# Altium PCB PCB_V2-0_采集卡.PcbDoc
Units mm, origin at the board's own origin, x right, y up, seen from the top; angles counter-clockwise.
Board outline 17.65 x 48.77 mm, 4 copper layers (Top Layer, Signal Layer 1, Signal Layer 2, Bottom Layer), stack 0.778 mm thick; 84 components, 84 nets, 253 pads, 75 vias.
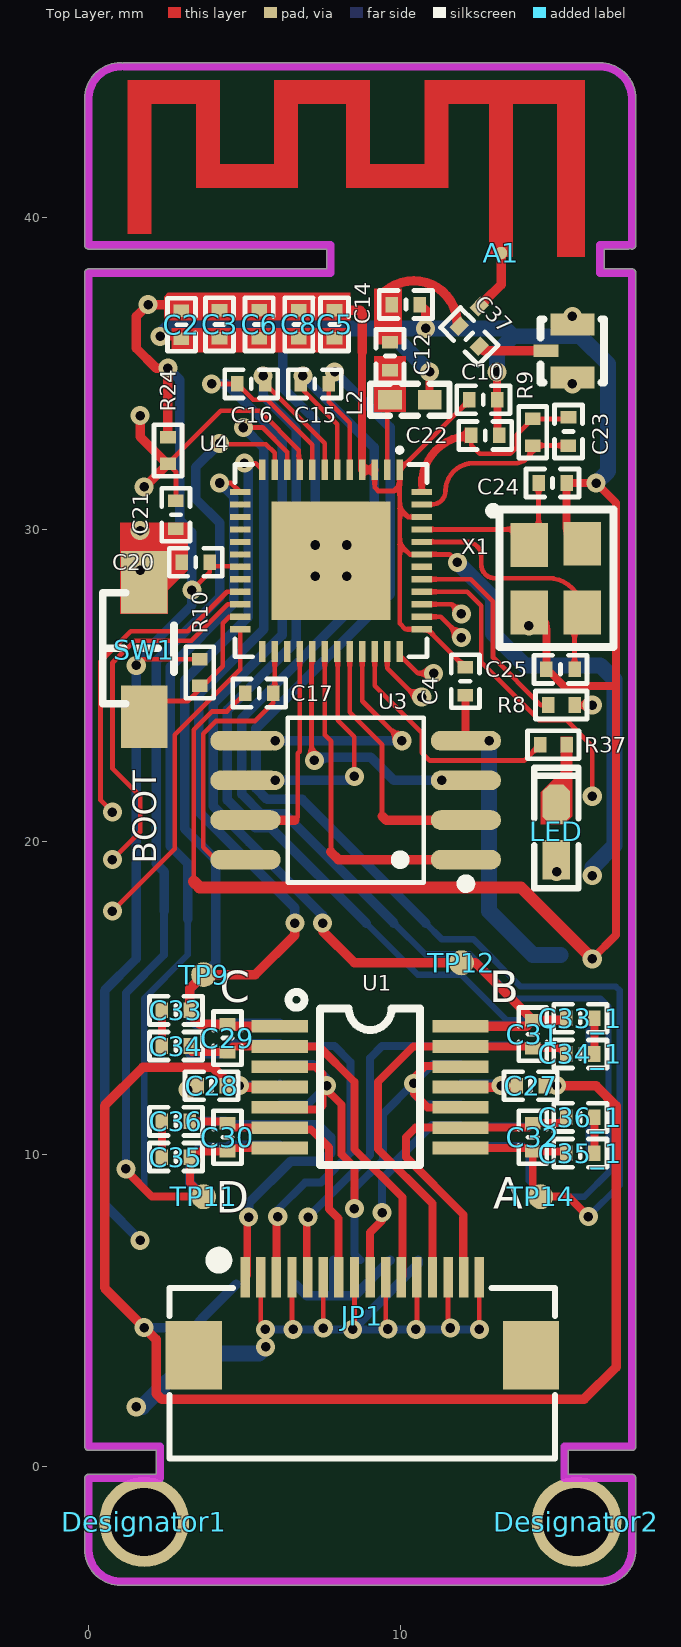
[diagram p0: Top Layer view]
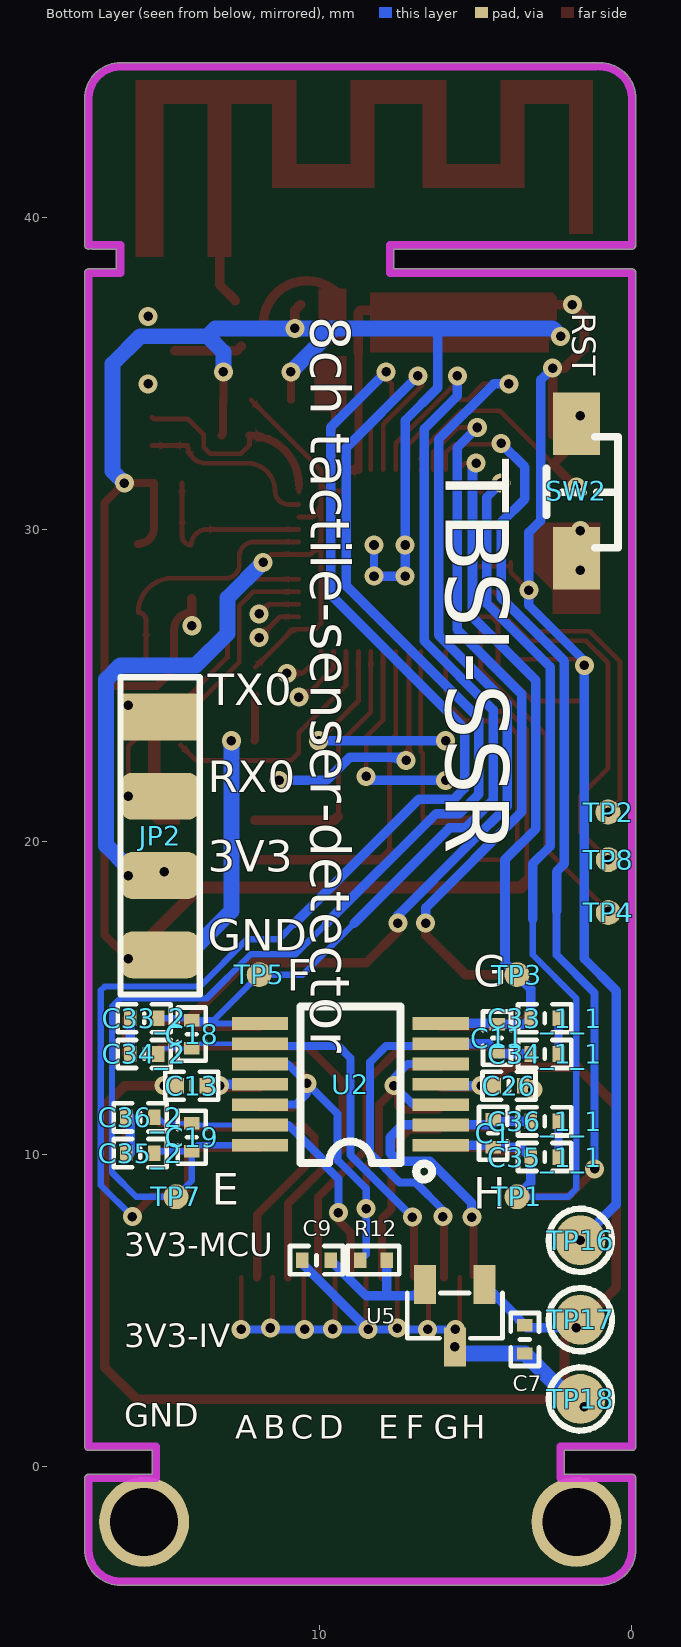
[diagram p1: Bottom Layer view, seen from below]
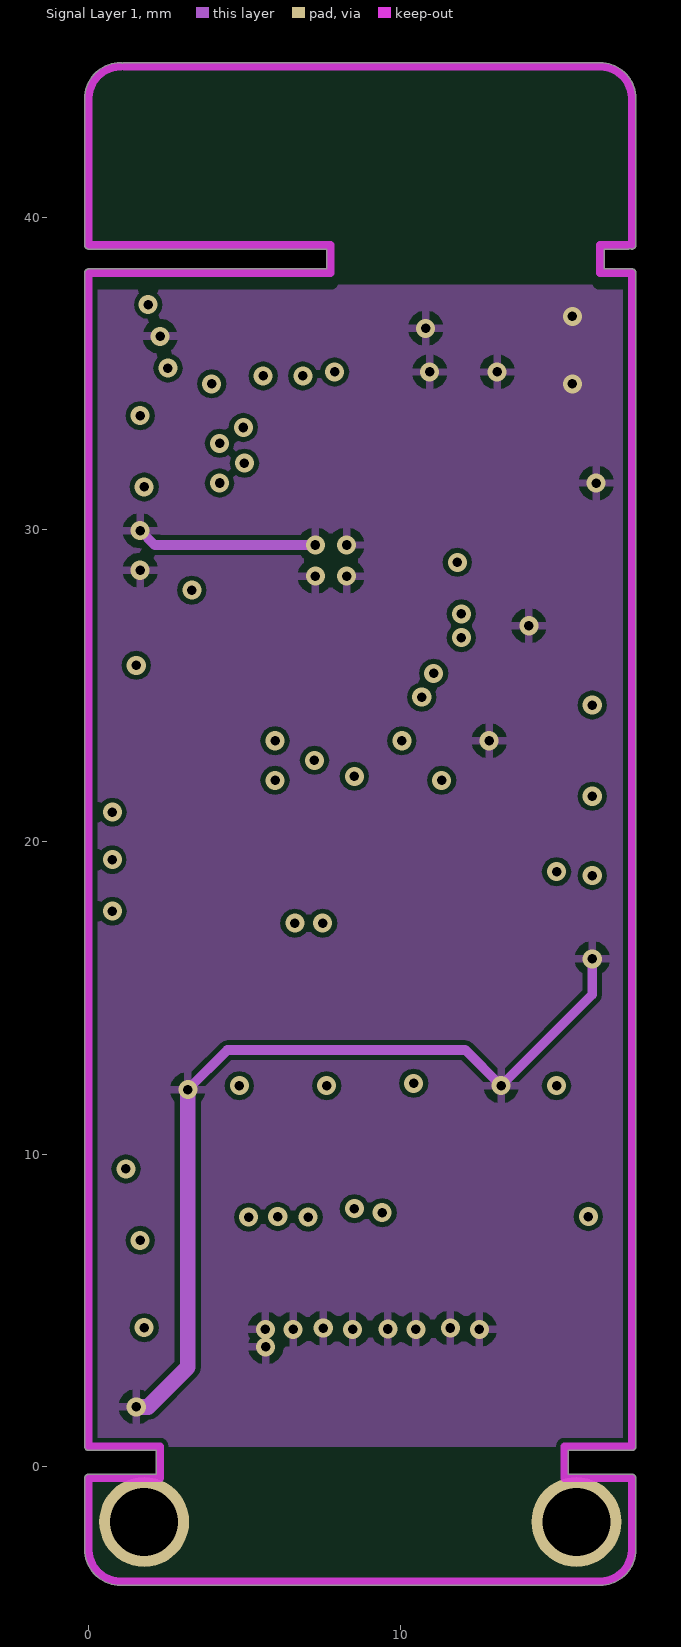
[diagram p2: Signal Layer 1]
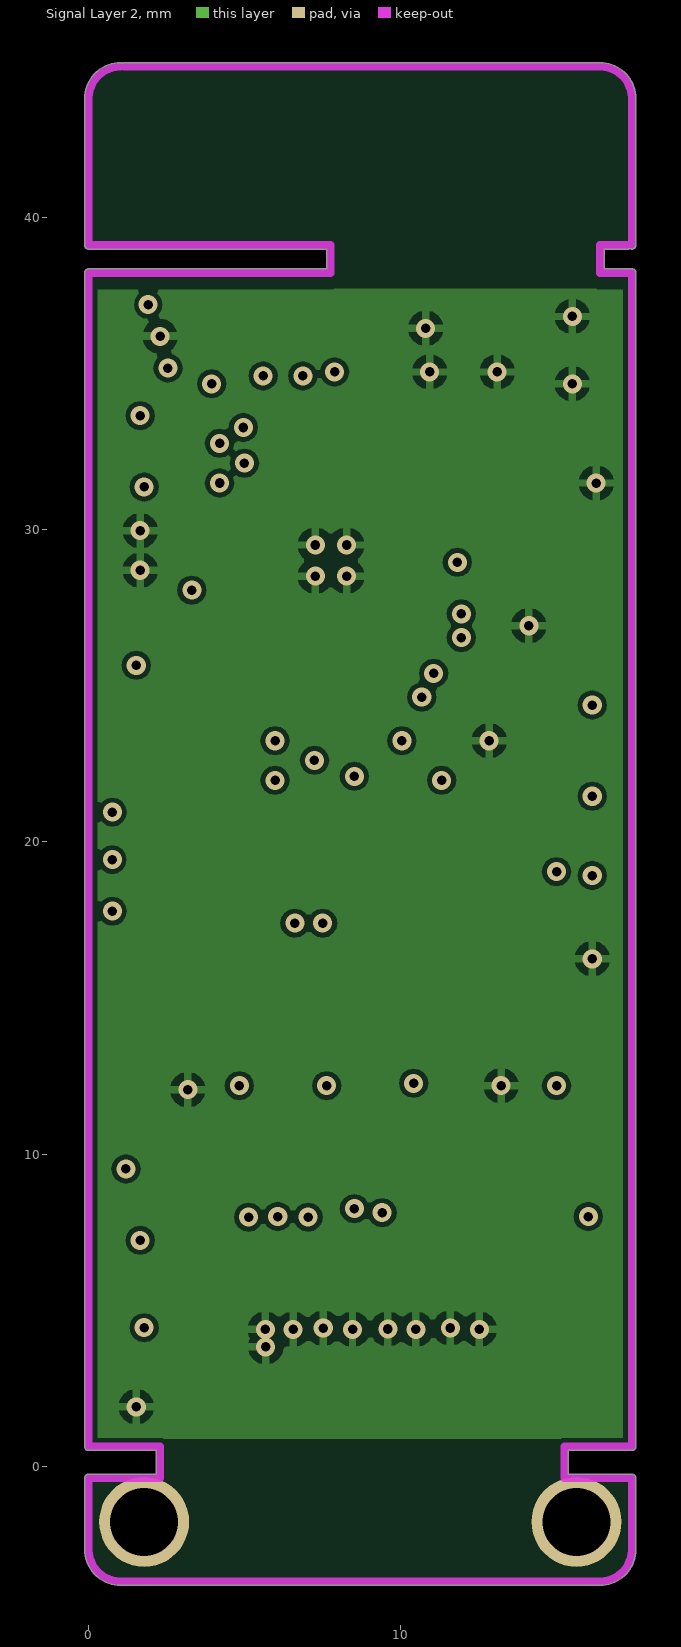
[diagram p3: Signal Layer 2]
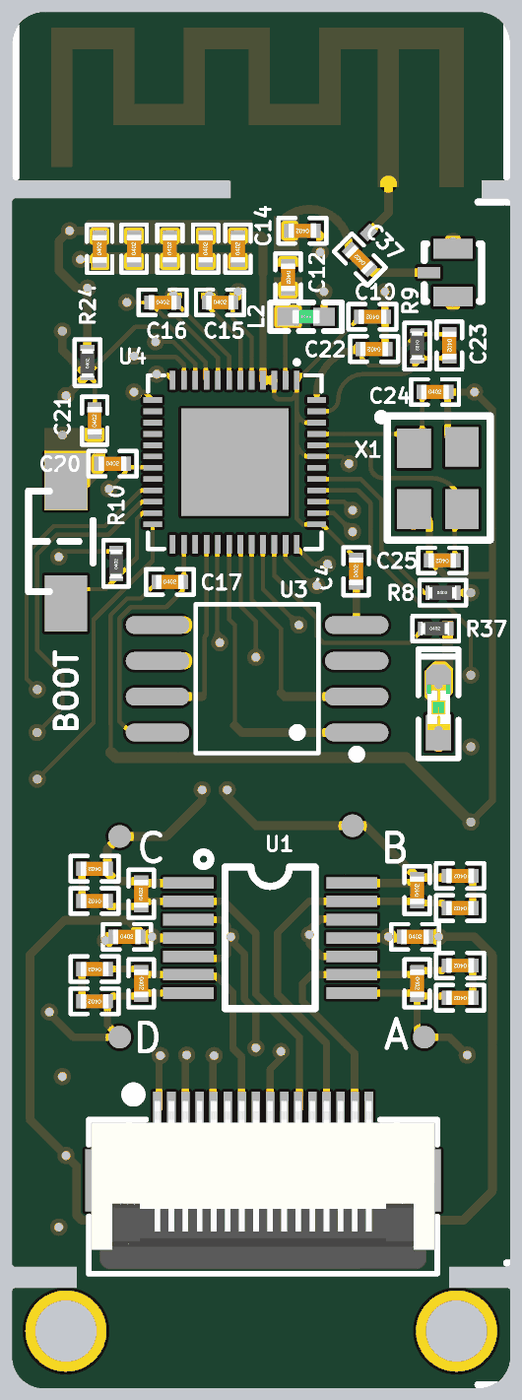
[diagram p4: 3D render of the assembled board from above, using the file's embedded part models]
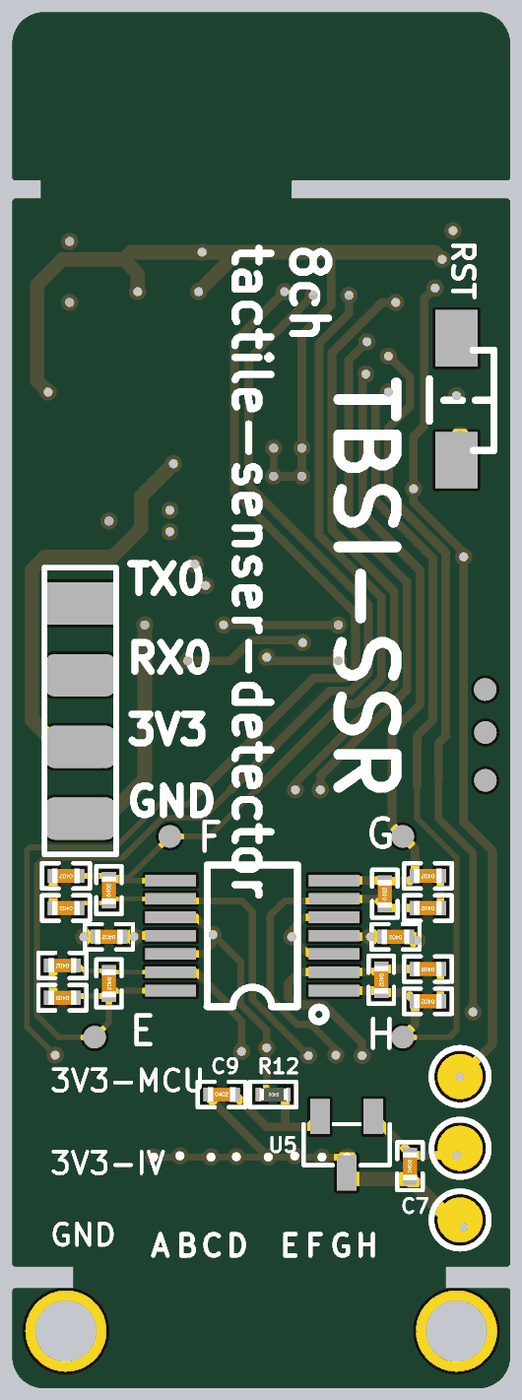
[diagram p5: 3D render of the assembled board from below, using the file's embedded part models]

## Layer stack, top to bottom
Top Solder: solder mask 0.0102, Solder Resist, Dk 3.5
Top Layer: signal copper 0.0356
Dielectric 1: core 0.254, FR-4, Dk 4.2
Signal Layer 1: signal copper 0.036
Dielectric 3: prepreg 0.127, Dk 4.2
Signal Layer 2: signal copper 0.036
Dielectric 2: core 0.254, Dk 4.2
Bottom Layer: signal copper 0.0356
Bottom Solder: solder mask 0.0102, Solder Resist, Dk 3.5

## Board outline
-0.127,-0.381 cw(c0,-0.381) 0,-0.254 2.159,-0.254 2.159,0.508 0,0.508 cw(c0,0.635) -0.127,0.635 -0.127,38.227 cw(c0,38.227) 0,38.354 7.62,38.354 7.62,38.989 0,38.989 cw(c0,39.116) -0.127,39.116 -0.127,43.815 cw(c1.016,43.815) 1.016,44.958 cw(c1.016,44.831) 1.079,44.941 cw(c1.143,44.831) 1.143,44.958 16.383,44.958 cw(c16.383,43.815) 17.526,43.815 17.526,39.116 cw(c17.399,39.116) 17.335,39.006 cw(c17.272,39.116) 17.272,38.989 16.51,38.989 16.51,38.354 17.399,38.354 cw(c17.399,38.227) 17.526,38.227 17.526,0.635 cw(c17.399,0.635) 17.399,0.508 15.367,0.508 15.367,-0.254 17.399,-0.254 cw(c17.399,-0.381) 17.526,-0.381 17.526,-2.667 cw(c16.383,-2.667) 16.383,-3.81 1.016,-3.81 cw(c1.016,-2.667) -0.127,-2.667

## Design rules (kind name [scope] priority, off if disabled: settings)
Clearance [All] p1: gap=0.152 ignorepadtopadclearanceinfootprint=FALSE except(0: Arc-Hole Track-Hole SMDPad-Hole THPad-Hole Via-Hole Fill-Hole Poly-Hole Region-Hole Text-Hole)
HoleToHoleClearance [All] p1: gap=0.102 allowstackedmicrovias=TRUE
MinimumSolderMaskSliver [All] p1: minsoldermaskwidth=0.102
PolygonConnect [All] p1: connectstyle=Relief reliefconductorwidth=0.254 reliefentries=4 polygonreliefangle="90 Angle" airgapwidth=0.254
RoutingVias [All] p1: holewidth=0.305 width=0.61 viastyle="Through Hole" minholewidth=0.305 minwidth=0.61 maxholewidth=0.381 maxwidth=0.635
SilkToSilkClearance [All] p1: silktosilkclearance=0
SilkToSolderMaskClearance [IsPad] p1: minsilkscreentomaskgap=0 clearancetoexposedcopper=TRUE
SolderMaskExpansion [All] p1: expansion=0.102
Width [All] p1: maxlimit=1.27 minlimit=0.152 preferedwidth=0.152
26 further rules are at their usual default settings.

## Classes and differential pairs
component class sheet: A1 C1 C2 C3 C4 C5 C6 C7 C8 C9 C10 C11 C12 C13 C14 C15 C16 C17 C18 C19 C20 C21 C22 C23 C24 C25 C26 C27 C28 C29 C30 C31 C32 JP2 L2 LED R8 R9 R10 R12 R24 R37 SW1 SW2 TP1 TP3 TP5 TP7 TP9 TP11 TP12 TP14 U1 U2 U3 U4 U5 X1

## Components (designator, comment, footprint, x,y, rotation, side; value= is the part's Value field where it differs from the comment)
A1 "PCB_ANT" PCB_ANT 8.636,41.021 r0 top
C1 "104" "C 0402_L" 4.445,10.668 r270 bottom
C2 "Cap" "C 0402_L" 2.971,36.566 r90 top value=1uF
C3 "Cap" "C 0402_L" 4.191,36.576 r90 top value=1uF
C4 "Cap" "C 0402_L" 12.065,25.146 r90 top value=0.1uF
C5 "Cap" "C 0402_L" 7.874,36.576 r90 top value=1uF
C6 "Cap" "C 0402_L" 5.461,36.576 r90 top value=10uF
C7 "Cap" "C 0402_L" 3.429,4.064 r90 bottom value=100nF
C8 "Cap" "C 0402_L" 6.731,36.576 r90 top value=0.1uF
C9 "Cap" "C 0402_L" 10.102,6.604 r180 bottom value=1uF
C10 "Cap" "C 0402_L" 12.642,34.163 r180 top value=0.1uF
C11 "104" "C 0402_L" 4.318,13.716 r90 bottom
C12 "Cap" "C 0402_L" 9.652,35.56 r270 top value=4.7pF
C13 "104" "C 0402_L" 14.097,12.192 r0 bottom
C14 "Cap" "C 0402_L" 10.16,37.211 r180 top value=2.7pF
C15 "Cap" "C 0402_L" 7.239,34.671 r0 top value=270pF
C16 "Cap" "C 0402_L" 5.207,34.671 r0 top value=270pF
C17 "Cap" "C 0402_L" 5.461,24.765 r0 top value=1uF
C18 "104" "C 0402_L" 14.097,13.843 r90 bottom
C19 "104" "C 0402_L" 14.097,10.541 r270 bottom
C20 "Cap" "C 0402_L" 3.429,28.956 r0 top value=0.1uF
C21 "Cap" "C 0402_L" 2.794,30.48 r90 top value=1uF
C22 "Cap" "C 0402_L" 12.7,33.02 r180 top value=10nF
C23 "Cap" "C 0402_L" 15.367,33.147 r270 top value=3.3nF
C24 "Cap" "C 0402_L" 14.859,31.496 r0 top value=22pF
C25 "Cap" "C 0402_L" 15.113,25.527 r180 top value=22pF
C26 "104" "C 0402_L" 3.937,12.192 r0 bottom
C27 "104" "C 0402_L" 14.155,12.192 r0 top
C28 "104" "C 0402_L" 3.937,12.192 r0 top
C29 "47pF" "C 0402_L" 4.445,13.716 r90 top
C30 "47pF" "C 0402_L" 4.445,10.541 r270 top
C31 "47pF" "C 0402_L" 14.224,13.843 r90 top
C32 "47pF" "C 0402_L" 14.224,10.541 r270 top
C33 "47pF" "C 0402_L" 2.794,14.605 r180 top (schematic designator C29)
C33_1 "47pF" "C 0402_L" 15.748,14.351 r180 top (schematic designator C29)
C33_1_1 "47pF" "C 0402_L" 2.794,14.351 r0 bottom (schematic designator C29)
C33_2 "47pF" "C 0402_L" 15.621,14.351 r0 bottom (schematic designator C29)
C34 "47pF" "C 0402_L" 2.794,13.462 r180 top (schematic designator C29)
C34_1 "47pF" "C 0402_L" 15.748,13.208 r180 top (schematic designator C29)
C34_1_1 "47pF" "C 0402_L" 2.794,13.208 r0 bottom (schematic designator C29)
C34_2 "47pF" "C 0402_L" 15.621,13.208 r0 bottom (schematic designator C29)
C35 "47pF" "C 0402_L" 2.794,9.906 r180 top (schematic designator C29)
C35_1 "47pF" "C 0402_L" 15.748,10.033 r180 top (schematic designator C29)
C35_1_1 "47pF" "C 0402_L" 2.794,9.906 r0 bottom (schematic designator C29)
C35_2 "47pF" "C 0402_L" 15.748,10.033 r0 bottom (schematic designator C29)
C36 "47pF" "C 0402_L" 2.794,11.049 r180 top (schematic designator C29)
C36_1 "47pF" "C 0402_L" 15.748,11.176 r180 top (schematic designator C29)
C36_1_1 "47pF" "C 0402_L" 2.794,11.049 r0 bottom (schematic designator C29)
C36_2 "47pF" "C 0402_L" 15.748,11.176 r0 bottom (schematic designator C29)
C37 "Cap" "C 0402_L" 12.192,36.195 r135 top value=0.1uF (schematic designator C10)
Designator1 "Comment" "M3 125X200" 1.778,-1.778 r0 top
Designator2 "Comment" "M3 125X200" 15.621,-1.778 r0 top
JP1 "HDR-1X16" "FPC0.5 2H-WS-16P" 8.763,3.556 r0 top
JP2 "HDR-1X4" 2.54_pad_4 15.113,20.193 r90 bottom
L2 "Inductor" "L 0402" 10.287,34.163 r180 top value=1.6nH
LED "红色" "LED 0603R" 14.986,20.32 r90 top (schematic designator LED1)
R8 "Res1" "R 0402_L" 15.113,24.384 r0 top value=499
R9 "Res1" "R 0402_L" 14.224,33.147 r270 top value=20K
R10 "Res1" "R 0402_L" 3.556,25.4 r90 top value=10K
R12 "Res1" "R 0402_L" 8.255,6.604 r0 bottom value=0
R24 "Res1" "R 0402_L" 2.54,32.512 r90 top value=10K
R37 "1K" "R 0402_L" 14.859,23.114 r0 top
SW1 "3x6x5" KEY-little 1.905,26.162 r0 top
SW2 "3x6x5" KEY-little 1.905,31.242 r0 bottom
TP1 "TEST" "TEST 0.8" 3.683,8.636 r180 bottom
TP2 "TEST" "TEST 0.8" 0.762,20.955 r270 bottom
TP3 "TEST" "TEST 0.8" 3.683,15.748 r180 bottom
TP4 "TEST" "TEST 0.8" 0.756,17.735 r270 bottom
TP5 "TEST" "TEST 0.8" 11.938,15.748 r180 bottom
TP7 "TEST" "TEST 0.8" 14.605,8.636 r180 bottom
TP8 "TEST" "TEST 0.8" 0.756,19.431 r270 bottom
TP9 "TEST" "TEST 0.8" 3.683,15.748 r270 top
TP11 "TEST" "TEST 0.8" 3.683,8.636 r90 top
TP12 "TEST" "TEST 0.8" 11.938,16.129 r90 top
TP14 "TEST" "TEST 0.8" 14.478,8.636 r90 top
TP16 "TEST" "TEST 1.6" 1.651,7.239 r180 bottom (schematic designator TP10)
TP17 "TEST" "TEST 1.6" 1.651,4.699 r180 bottom (schematic designator TP10)
TP18 "TEST" "TEST 1.6" 1.651,2.159 r180 bottom (schematic designator TP10)
U1 "ADA4505-4ARUZ" ADA4505-4ARUZ 8.89,12.065 r0 top
U2 "ADA4505-4ARUZ" ADA4505-4ARUZ 8.89,12.319 r0 bottom
U3 "SPI-FLASH" SPI-Flash 8.763,21.336 r90 top
U4 "ESP32-D0WDQ6" ESP32D0WDQ6 7.76,29.01 r180 top
U5 "REF2925" REF2925AIDBZR 5.715,5.08 r90 bottom
X1 "40M" 晶振3225 15.113,28.321 r270 top

## Footprints (in the part's own frame and the unit in brackets; to place one, negate y for a bottom-side part, rotate by r counter-clockwise, add the part's x,y. Pads: shape width x height; smd on the part's side, far side on the other; paste and mask are expansions set on the pad)
2.54_pad_4 [mm]
  rect 1.5x2.54 smd: 1(3.81,0)
  rrect50% 1.5x2.54 smd: 2(1.27,0) 3(-1.27,0) 4(-3.81,0)
  silkscreen extent -5.08,-1.27 5.08,1.27
ADA4505-4ARUZ [mil]
  rect 71x16 smd: 1(-109,80.04) 2(-109,54.45) 3(-109,28.86) 4(-109,3.27) 5(-109,-22.32) 6(-109,-47.91) 7(-109,-73.5) 8(119,-73.5) 9(119,-47.91) 10(119,-22.32) 11(119,3.27) 12(119,28.86) 13(119,54.45) 14(119,80.04)
  silkscreen extent -98,-95 68,123
"C 0402_L" [mm] "无极性贴片电容"
  rect 0.4x0.5 smd: 1(-0.45,0) 2(0.45,0)
  silkscreen extent -0.85,-0.45 0.85,0.45, body extent -0.5,-0.26 0.5,0.26, height 0.53
ESP32D0WDQ6 [mm]
  rect 0.2x0.665 smd: 1(-2.2,-2.908) 2(-1.8,-2.908) 3(-1.4,-2.908) 4(-1,-2.908) 5(-0.6,-2.908) 6(-0.2,-2.908) 7(0.2,-2.908) 8(0.6,-2.908) 9(1,-2.908) 10(1.4,-2.908) 11(1.8,-2.908) 12(2.2,-2.908) 25(2.2,2.908) 26(1.8,2.908) 27(1.4,2.908) 28(1,2.908) 29(0.6,2.908) 30(0.2,2.908) 31(-0.2,2.908) 32(-0.6,2.908) 33(-1,2.908) 34(-1.4,2.908) 35(-1.8,2.908) 36(-2.2,2.908)
  rect 0.665x0.2 smd: 13(2.908,-2.2) 14(2.908,-1.8) 15(2.908,-1.4) 16(2.908,-1) 17(2.908,-0.6) 18(2.908,-0.2) 19(2.908,0.2) 20(2.908,0.6) 21(2.908,1) 22(2.908,1.4) 23(2.908,1.8) 24(2.908,2.2) 37(-2.908,2.2) 38(-2.908,1.8) 39(-2.908,1.4) 40(-2.908,1) 41(-2.908,0.6) 42(-2.908,0.2) 43(-2.908,-0.2) 44(-2.908,-0.6) 45(-2.908,-1) 46(-2.908,-1.4) 47(-2.908,-1.8) 48(-2.908,-2.2)
  rect 3.8x3.8 smd: 49(0,0)
  silkscreen extent -3.08,-3.61 3.08,3.08
"FPC0.5 2H-WS-16P" [mm] "长：12.2mm，宽：5.2mm，高：2mm"
  rect 1.8x2.2 smd: 0(-5.4,0) 0(5.4,0)
  rect 0.3x1.3 smd: 1(-3.75,2.497) 2(-3.25,2.497) 3(-2.75,2.497) 4(-2.25,2.497) 5(-1.75,2.497) 6(-1.25,2.497) 7(-0.75,2.497) 8(-0.25,2.497) 9(0.25,2.497) 10(0.75,2.497) 11(1.25,2.497) 12(1.75,2.497) 13(2.25,2.497) 14(2.75,2.497) 15(3.25,2.497) 16(3.75,2.497)
  silkscreen extent -6.18,-3.3 6.18,3.23, body extent -6.1,-3.15 6.1,2.85, height 2
KEY-little [mm]
  rect 1.5x2 smd: 1(-0.127,-2.159) 2(-0.127,2.159)
  silkscreen extent -1.45,-1.74 0.83,1.82
"L 0402" [mil] "小功率贴片电感"
  rect 30x25 smd: 1(-25,0) 2(25,0)
  silkscreen extent -50,-20 50,20, body extent -20,-10 20,10, height 20
"LED 0603R" [mil] "红色0603LED"
  rect 50x35 smd: 1(-35,0.26)
  oct 50x35 smd: 2(35,0.26)
  silkscreen extent -71,-28 81,28, body extent -31,-16 31,16, height 18
"M3 125X200" [mm] "M3螺丝孔，孔125Mil，焊盘200Mil"
  round 2.88 hole 2.175: 1(0,0)
PCB_ANT [mm]
  round 0.4 smd paste-0.2: 1(4.572,-2.159)
  Top Layer region: 4.195,-2.273 4.949,-2.273 4.949,2.627 6.368,2.627 6.368,-2.273 7.249,-2.273 7.249,3.381 2.122,3.381 2.122,0.681 0.365,0.681 0.365,3.381 -2.689,3.381 -2.689,0.681 -4.435,0.681 -4.435,3.381 -7.389,3.381 -7.389,-1.547 -6.635,-1.547 -6.635,2.627 -5.189,2.627 -5.189,-0.073 -1.935,-0.073 -1.935,2.627 -0.389,2.627 -0.389,-0.073 2.876,-0.073 2.876,2.627 4.195,2.627 4.195,-2.273
"R 0402_L" [mm] "1/16W贴片电阻"
  rect 0.4x0.5 smd: 1(-0.4,0) 2(0.45,0)
  silkscreen extent -0.8,-0.45 0.85,0.45, body extent -0.5,-0.25 0.5,0.25, height 0.3
REF2925AIDBZR [mm]
  rect 1.25x0.7 smd: 1(0.746,-0.994) 2(0.746,0.906) 3(-1.254,-0.044)
  silkscreen extent -0.98,-1.57 0.47,1.48
SPI-Flash [mm]
  oval 0.63x2.25 smd: 1(-1.905,-3.32) 2(-0.635,-3.32) 3(0.635,-3.32) 4(1.905,-3.32) 5(1.905,3.74) 6(0.635,3.74) 7(-0.635,3.74) 8(-1.905,3.74)
  silkscreen extent -2.82,-3.47 2.64,2.39
"TEST 0.8" [mm] "测试点0.8mm"
  round 0.8 smd: 1(0,0)
"TEST 1.6" [mm] "测试点1.6mm"
  round 1.6 smd paste-1.6: 1(0,0)
  silkscreen extent -1.02,-1.02 1.01,1.02
晶振3225 [mm]
  rect 1.4x1.2 smd: 1(-1.186,-0.998) 2(0.973,-0.998) 3(0.973,0.702) 4(-1.227,0.702)
  silkscreen extent -2.41,-2.29 2.07,1.7

## Part data
A1: "2.4G-esp32"
C1 C11 C13 C18 C19 C26 C27 C28 C29 C30 C31 C32 C33 C33_1 C33_1_1 C33_2 C34 C34_1 C34_1_1 C34_2 C35 C35_1 C35_1_1 C35_2 C36 C36_1 C36_1_1 C36_2: library part C, "无极性贴片电容", BOM名称=无极性贴片电容, 学习资源=www.ooocke.com, 版权归属=源创客
C2 C3 C4 C5 C6 C7 C8 C9 C10 C12 C14 C15 C16 C17 C20 C21 C22 C23 C24 C25 C37: "Capacitor", LatestRevisionDate=17-Jul-2002, LatestRevisionNote="Re-released for DXP Platform.", PackageDescription="Radial Cap, Thru-Hole; 2 Leads; 0.3 in Pin Spacing", PackageReference=RAD-0.3, Published=8-Jun-2000, Publisher="Altium Limited"
JP1: library part "Header 16", "16P接插件", BOM名称=16P接插件, 学习资源=www.ooocke.com, 版权归属=源创客
JP2: library part "Header 4", "4P接插件", BOM名称=4P接插件, 学习资源=www.ooocke.com, 版权归属=源创客
LED: library part LED-SMD, "贴片LED", BOM名称=贴片LED, 学习资源=www.ooocke.com, 版权归属=源创客
R8 R9 R10 R12 R24: "Resistor", LatestRevisionDate=17-Jul-2002, LatestRevisionNote="Re-released for DXP Platform.", PackageDescription="Axial Device, Thru-Hole; 2 Leads; 0.3 in Pin Spacing", PackageReference=AXIAL-0.3, Published=8-Jun-2000, Publisher="Altium Limited"
R37: library part R, "贴片电阻", BOM名称=贴片电阻, 学习资源=www.ooocke.com, 版权归属=源创客
SW1 SW2: library part "TSW 3x6", "3x6轻触开关", BOM名称=3x6轻触开关, 学习资源=www.ooocke.com, 版权归属=源创客
TP1 TP2 TP3 TP4 TP5 TP7 TP8 TP9 TP11 TP12 TP14 TP16 TP17 TP18: "测试点", BOM名称=测试点, 学习资源=www.ooocke.com, 版权归属=源创客
U5: "2.5V reference"
X1: library part XTAL-4P, "4脚无源晶振", BOM名称=4脚无源晶振, 学习资源=www.ooocke.com, 版权归属=源创客
L2: Code_IEC=1005, Code_JEITA=0402, LatestRevisionDate=29-May-2009, LatestRevisionNote="IPC-7351 Footprint Added.", PackageDescription="Chip Inductor", PackageReference=0402-A, Published=8-Jun-2000, Publisher="Altium Limited"

## Free pads (board coordinates)
  rect 0.4x0.5 smd rot 135: 1(12.509,37.148)
  rect 0.8x0.4 smd: 1(14.644,35.726)
  rect 1.4x0.7 smd: 2(15.494,34.876) 3(15.494,36.576)

## Via types
v1: diameter 0.61, hole 0.305, Top Layer to Bottom Layer, tented both sides, 74 vias
v2: diameter 0.61, hole 0.305, Top Layer to Bottom Layer, 1 vias

## Nets (pads, with @x,y where several pads share a name; then routed paths per layer and width w, separated by ;. In a path a pad name is that pad's centre, name@x,y a point inside that pad or via, vN(x,y) a via of type N, cw(c..) or ccw(c..) an arc to the next point about the centre after c; other vN are vias at no path point)
+3.3: C2.2 C3.2 C4.2 C5.2 C6.2 C8.2 C10.2 C20.2 JP2.3 LED.1 R10.2 R24.2 TP16.1 U4.1 U4.3 U4.4 U4.19 U4.37 U4.43 U4.46 | length 75.5
  Top Layer w0.152: v1(1.524,25.654) 1.72,25.85 R10.2 ; C2.2@2.776,37.211 C2.2 ; v1(3.302,28.067) 3.879,28.644 C20.2 ; C20.2@3.948,28.829 4.834,28.829 cw(c4.834,28.81) U4.19 ; U4.3 9.16,31.353 9.271,31.242 9.779,31.242 9.96,31.423 ; U4.46 10.23,30.41 9.96,30.68 ; v1(11.811,28.956) 11.557,29.21 U4.43 10.287,29.21 9.96,29.537 ; C4.2 10.851,26.81 U4.37 10.147,26.81 9.96,26.997 9.96,29.537 ; C10.2 12.192,34.149 U4.1 9.96,31.423 ; 9.96,29.537 9.96,30.68 ; 9.96,30.68 9.96,31.423
  Top Layer w0.254: 8.76,35.69 U4.4 U4.3
  Top Layer w0.305: R24.2@2.54,33.038 v1(2.54,35.179) 2.159,35.179 1.524,35.814 1.524,36.83 v1(1.905,37.211) C2.2@2.776,37.211 ; C5.2 8.694,37.026 8.763,36.957 8.763,35.692 8.76,35.69
  Bottom Layer w0.305: v1(1.651,7.239) 0.508,8.382 0.508,15.24 1.524,16.256 v1(1.524,25.654) 1.524,25.804 3.302,27.582 v1(3.302,28.067) 3.302,29.914 2.921,30.295 2.921,34.798 v1(2.54,35.179)
  Bottom Layer w0.508: v1(11.811,28.956) 12.954,27.813 12.954,26.67 13.97,25.654 16.383,25.654 16.84,25.197 16.84,19.888 16.129,19.177 v1(16.129,18.923)
  other v1: 14.986,19.05
+5: C7.2 C13.2 C26.2 C27.2 C28.2 TP17.1 U1.4 U2.4 U5.1 | length 47.4
  Top Layer w0.305: C28.2 4.431,12.148 U1.4 ; v1(4.826,12.192) 4.572,12.192 3.984,12.78 1.731,12.78 0.508,11.557 0.508,5.715 v1(1.778,4.445) 2.158,4.065 2.158,2.33 2.337,2.151 15.867,2.151 16.891,3.175 16.891,11.543 16.256,12.178 16.256,12.192 v1(14.986,12.192)
  Bottom Layer w0.305: v1(1.778,4.445) 3.36,4.445 C7.2 3.617,4.702 3.617,4.722 U5.1 ; v1(4.826,12.192) 6.077,12.192 U2.4
A1-2: C12.1 C14.2 C37.2 | length 3.4
  Top Layer w0.305: 9.356,37.489 cw(c10.414,36.576) C37.2@11.811,36.576
A1-3: C37.1 pad.1@14.644,35.726 | length 2.2
  Top Layer w0.305: C37.1 12.661,35.726 pad.1@14.644,35.726
ADA4505_INA-: C1.1 C36_1_1.2 JP1.1 U2.2 | length 10.9
  Top Layer w0.152: JP1.1 JP1.1@5.08,6.12
  Top Layer w0.254: JP1.1@5.08,6.12 v1@5.08,7.982
  Bottom Layer w0.305: C36_1_1.2 4.376,11.049 4.489,10.936 U2.2 7.352,10.936 7.747,10.541 7.747,10.033 7.492,9.778 6.476,9.778 5.123,8.425 v1(5.123,7.982)
ADA4505_INB-: C11.1 C34_1_1.2 JP1.3 U2.6 | length 13.7
  Top Layer w0.254: JP1.3 v1@6.013,8.001
  Bottom Layer w0.254: v1(6.056,8.001) 6.056,8.215 6.934,9.093 7.442,9.093 8.382,10.033 8.382,12.954 7.874,13.462 6.195,13.462 U2.6
  Bottom Layer w0.305: C34_1_1.2 4.26,13.208 C11.1 4.588,13.536 U2.6
ADA4505_INC-: C18.1 C34_2.1 JP1.5 U2.9 | length 14.3
  Top Layer w0.152: JP1.5@6.985,6.081 JP1.5
  Top Layer w0.254: JP1.5@6.985,6.081 v1@6.985,7.982
  Bottom Layer w0.152: U2.9 13.954,13.536 C18.1 14.986,13.393 C34_2.1
  Bottom Layer w0.254: v1(7.028,7.982) 9.017,9.971 9.017,13.081 9.398,13.462 11.839,13.462 U2.9
ADA4505_IND-: C19.1 C36_2.1 JP1.9 U2.13 | length 10
  Top Layer w0.254: JP1.9 9.013,7.489 9.398,7.874 v1(9.398,8.128)
  Bottom Layer w0.152: U2.13 14.042,10.936 C19.1 14.986,10.991 C36_2.1@15.171,11.176
  Bottom Layer w0.254: v1(9.398,8.128) 9.398,9.203 9.83,9.634 9.83,9.768 10.998,10.936 U2.13
ADA4505_INE-: C29.1 C34.1 JP1.11 U1.2 | length 12.8
  Top Layer w0.152: C34.1@3.244,13.335 C34.1@3.313,13.266 ; JP1.11 JP1.11@10.033,6.073
  Top Layer w0.254: C34.1@3.313,13.266 C29.1 4.627,13.448 U1.2 7.38,13.448 8.509,12.319 8.509,10.16 10.051,8.618 10.051,6.091 JP1.11@10.033,6.073
ADA4505_INF-: C30.1 C36.1 JP1.7 U1.6 | length 9.1
  Top Layer w0.152: JP1.7@8.001,6.065 JP1.7
  Top Layer w0.254: C36.1 4.387,11.049 C30.1 4.588,10.848 U1.6 6.174,10.795 7.112,10.795 7.696,10.211 7.696,8.242 8.001,7.937 JP1.7@8.001,6.065
ADA4505_ING-: C31.1 C34_1.2 JP1.13 U1.13 | length 15.5
  Top Layer w0.152: JP1.13 11.049,6.089 11.049,7.982
  Top Layer w0.254: JP1.13 11.013,8.418 9.271,10.16 9.271,12.319 10.4,13.448 U1.13 14.169,13.448 C31.1 15.113,13.393 C34_1.2
ADA4505_INH-: C32.1 C36_1.2 JP1.15 U1.9 | length 12.6
  Top Layer w0.152: 11.938,7.982 11.938,6.128 JP1.15
  Top Layer w0.254: JP1.15 12.013,8.053 10.16,9.906 10.16,10.541 10.467,10.848 U1.9 14.081,10.848 C32.1 15.113,10.991 C36_1.2
ADA4505_OUTA: C1.2 C35_1_1.2 TP1.1 U2.1 U4.13 | length 31.8
  Top Layer w0.152: v1@4.191,31.432 v1(4.191,31.496) 4.567,31.496 U4.13
  Bottom Layer w0.203: 3.175,17.526 3.175,16.383 1.778,14.986 1.778,8.89 2.032,8.636 TP1.1
  Bottom Layer w0.305: 3.175,17.526 3.175,19.304 2.616,19.863 2.616,25.603 4.648,27.635 4.648,31.039 v1(4.191,31.496) ; TP1.1 3.244,9.075 C35_1_1.2 3.556,10.218 C1.2 4.513,10.286 U2.1
ADA4505_OUTB: C11.2 C33_1_1.2 TP3.1 U2.7 U4.12 | length 23
  Top Layer w0.152: v1(4.99,32.131) 5.347,32.131 U4.12
  Bottom Layer w0.305: v1(4.99,32.131) 5.105,32.016 5.105,27.203 3.073,25.171 3.073,20.422 4.064,19.431 4.064,16.129 TP3.1 3.244,15.309 C33_1_1.2 3.429,14.166 C11.2 4.338,14.186 U2.7
ADA4505_OUTC: C16.2 C18.2 C33_2.1 TP5.1 U2.8 U4.7 | length 34.7
  Top Layer w0.152: v1(5.588,34.925) 5.588,34.74 C16.2 7.56,32.767 U4.7
  Bottom Layer w0.203: 8.89,17.399 10.541,15.748 TP5.1 13.393,14.293 C18.2 ; U2.8 13.99,14.186 C18.2 ; C33_2.1 14.155,14.351 C18.2
  Bottom Layer w0.305: v1(5.588,34.925) 5.588,34.29 6.651,33.227 6.651,26.436 4.445,24.23 4.445,21.34 5.338,20.447 5.842,20.447 8.89,17.399
ADA4505_OUTD: C15.1 C19.2 C35_2.1 TP7.1 U2.14 U4.6 | length 46.9
  Top Layer w0.152: C15.1@6.726,34.608 7.96,33.373 U4.6 ; C15.1 6.731,34.729 6.858,34.856 v1(6.858,34.925)
  Bottom Layer w0.203: 9.779,17.399 10.776,16.402 12.209,16.402 13.625,14.986 16.383,14.986 16.652,14.717 16.652,9.413 15.875,8.636 TP7.1 14.097,9.144 C19.2 ; U2.14 13.902,10.286 C19.2 ; C35_2.1@15.171,10.033 15.113,10.091 C19.2
  Bottom Layer w0.305: v1(6.858,34.925) 9.144,32.639 9.144,28.194 4.902,23.952 4.902,21.529 5.527,20.904 6.274,20.904 9.779,17.399
ADA4505_OUTE: C29.2 C33.1 TP9.1 U1.1 U4.10 | length 29
  Top Layer w0.152: v1@4.953,33.147 v1(4.953,33.274) 5.575,33.274 6.36,32.489 U4.10
  Top Layer w0.305: C29.2@4.445,14.098 U1.1 ; C29.2 3.556,14.166 3.244,14.478 C33.1 3.244,15.309 TP9.1 5.334,15.748 6.604,17.018 v1(6.604,17.399)
  Bottom Layer w0.305: v1(4.953,33.274) 5.6,32.627 5.6,26.809 3.531,24.74 3.531,20.961 6.604,17.888 v1(6.604,17.399)
ADA4505_OUTF: C30.2 C35.1 TP11.1 U1.7 U4.11 | length 35.1
  Top Layer w0.152: v1(4.191,32.766) 4.216,32.741 5.678,32.741 5.96,32.458 U4.11
  Top Layer w0.254: v1(1.194,9.525) 1.194,9.474 2.032,8.636 TP11.1 3.244,9.075 C35.1 3.429,10.091 C30.2 4.552,10.198 U1.7
  Bottom Layer w0.254: v1(1.194,9.525) 1.194,15.164 2.413,16.383 2.413,17.78
  Bottom Layer w0.305: 2.413,17.78 2.413,19.05 2.159,19.304 2.159,25.793 4.191,27.825 4.191,30.226 3.429,30.988 3.429,32.004 v1(4.191,32.766)
ADA4505_OUTG: C16.1 C31.2 C33_1.2 TP12.1 U1.14 U4.8 | length 37.3
  Top Layer w0.152: v1(3.937,34.671) C16.1 5.265,34.163 5.715,34.163 7.16,32.718 U4.8
  Top Layer w0.305: v1(7.493,17.399) 7.493,17.145 8.509,16.129 TP12.1 12.388,16.129 C31.2 ; U1.14 14.029,14.098 C31.2 ; C33_1.2 15.24,14.293 C31.2
  Bottom Layer w0.305: v1(3.937,34.671) 4.418,34.671 6.194,32.896 6.194,26.625 3.988,24.419 3.988,21.15 5.148,19.99 7.493,17.645 v1(7.493,17.399)
ADA4505_OUTH: C15.2 C32.2 C35_1.2 TP14.1 U1.8 U4.5 | length 48.1
  Top Layer w0.152: v1(7.874,35.052) 7.874,34.856 C15.2 7.689,34.094 8.36,33.423 U4.5
  Top Layer w0.254: U1.8 14.117,10.198 C32.2 ; C35_1.2 15.24,10.091 C32.2 ; v1(16.002,8.001) 15.367,8.636 TP14.1 14.224,8.89 C32.2
  Bottom Layer w0.203: 10.795,17.399 11.303,16.891 11.303,16.883 12.327,16.883 13.843,15.367 16.886,15.367 17.008,15.245 17.008,9.007 v1(16.002,8.001)
  Bottom Layer w0.305: v1(7.874,35.052) 9.652,33.274 9.652,27.928 5.359,23.636 5.359,21.718 5.716,21.361 6.833,21.361 10.795,17.399
BOOT: R10.1 SW1.1 U4.23 | length 5.1
  Top Layer w0.152: SW1.1@1.651,24.511 3.175,24.511 4.292,25.628 4.292,27.005 4.497,27.21 U4.23
CAP1: C22.2 C23.1 R9.1 U4.48 | length 7
  Top Layer w0.152: U4.48 10.668,31.438 ; C22.2 12.25,32.708 12.522,32.436 13.496,32.436 13.521,32.461 13.538,32.461 13.716,32.639 13.716,33.039 R9.1 15.317,33.547 C23.1
  Top Layer w0.254: 10.668,31.438 cw(c12.25,31.438) C22.2
CAP2: C23.2 R9.2 U4.47 | length 5.8
  Top Layer w0.152: U4.47 10.998,30.81 ccw(c10.998,31.242) 11.43,31.242 cw(c12.319,31.242) 12.319,32.131 13.658,32.131 ccw(c13.658,32.697) R9.2 C23.2
CHIP_PU: C21.2 R24.1 SW2.1 U4.9 | length 10.5
  Top Layer w0.152: C21.2 2.794,31.858 R24.1 4.236,33.807 5.473,33.807 6.731,32.549 6.731,31.947 U4.9
  Top Layer w0.305: v1(1.651,33.655) 1.651,32.97 2.509,32.112 R24.1 1.797,31.369 v1(1.778,31.369) v1@1.875,31.466
GND: C2.1 C3.1 C4.1 C5.1 C6.1 C7.1 C8.1 C9.1 C10.1 C13.1 C14.1 C17.1 C20.1 C21.1 C22.1 C24.2 C25.2 C26.1 C27.1 C28.1 JP1.2 JP1.4 JP1.6 JP1.8 JP1.10 JP1.12 JP1.14 JP1.16 JP2.4 L2.1 pad.2 pad.3 SW1.2 SW2.2 TP18.1 U1.11 U2.11 U3.4 U4.49 U5.3 X1.2 X1.4 | length 163.3
  Top Layer w0.152: 3.365,19.699 3.365,23.592 3.953,24.181 4.427,24.181 C17.1 ; 3.365,18.732 3.365,19.698 ; v1@5.513,4.393 JP1.2 ; v1@6.513,4.387 JP1.4 ; v1(7.513,4.425) JP1.6 ; v1(8.451,4.387) 8.513,4.449 JP1.8 ; v1@9.513,4.399 JP1.10 ; v1(10.483,4.387) 10.513,4.417 JP1.12 ; v1@11.513,4.431 JP1.14 ; v1@12.446,4.318 12.513,4.385 JP1.16 ; C27.1@13.661,12.148 C27.1
  Top Layer w0.254: v1(2.286,36.195) 2.796,36.195 2.923,36.068 C2.1 7.864,36.116 C5.1 ; L2.1 v1(10.922,35.052) ; C4.1 12.065,23.259 U3.4 ; C10.1@13.081,34.105 v1(13.081,35.052) ; C10.1 13.092,33.078 C22.1 ; X1.2 cw(c14.115,26.8) 14.663,26.8 C25.2 14.689,25.527 15.219,24.998 16.891,24.998 16.891,17.018 v1(16.129,16.256) ; X1.4 cw(c15.815,30.054) 15.309,30.054 C24.2 v1(16.256,31.496) 16.891,30.861 16.891,25.019
  Top Layer w0.305: C14.1 10.795,37.026 v1(10.795,36.449) ; U1.11 C27.1@13.661,12.148 ; v1(14.097,26.924) X1.2@14.097,27.795
  Top Layer w0.381: 3.365,18.732 3.556,18.542 13.843,18.542 v1(16.129,16.256)
  Signal Layer 1 w0.305: v1(1.651,29.972) 2.113,29.51 v1(7.26,29.51) ; v1(3.175,12.065) 4.445,13.335 12.065,13.335 v1(13.208,12.192) 16.129,15.113 v1(16.129,16.256)
  Signal Layer 1 w0.508: v1(1.524,1.905) 1.905,1.905 3.175,3.175 v1(3.175,12.065)
  Bottom Layer w0.254: SW2.2@1.27,29.337 1.524,29.337 SW2.2 1.651,28.956 v1(1.651,28.702) ; v2(5.671,3.826) 5.671,4.373 v1(5.657,4.387) v1(6.546,4.387) v1(8.451,4.387) v1(10.483,4.387) v1(12.515,4.387) ; v1(8.26,28.51) v1(8.26,29.51)
  Bottom Layer w0.305: 6.223,36.449 6.223,34.544 7.26,33.507 v1(7.26,29.51) v1(7.26,28.51) v1(8.26,28.51) ; v1(8.451,4.387) 10.552,6.488 C9.1 ; U2.11 13.164,12.236 v1(13.208,12.192)
  Bottom Layer w0.508: v1(1.524,1.905) 1.72,1.905 C7.1 5.459,3.614 v2(5.671,3.826) ; v1(2.286,36.195) 2.54,36.449 6.223,36.449 9.525,36.449 ; v1(10.922,35.052) 9.525,36.449 ; v1(12.827,23.241) 12.827,17.78 14.224,16.383 JP2.4 ; v1(13.081,35.052) 13.081,35.687 13.589,36.195 ; v1(16.256,31.496) 16.637,31.877 16.637,35.306 15.748,36.195 13.589,36.195 ; 9.525,36.449 v1(10.795,36.449) 13.335,36.449 13.589,36.195
  other v1: 9.582,4.399 11.582,4.431 15.494,34.671 15.494,36.83
GPIO2: TP8.1 U4.22 | length 11.9
  Top Layer w0.152: v1(0.756,19.431) 0.762,19.431 1.651,20.32 1.651,21.463 0.762,22.352 0.762,25.731 1.472,26.441 3.293,26.441 4.461,27.61 U4.22
GPIO4: TP4.1 U4.24 | length 10.7
  Top Layer w0.152: v1(0.762,17.78) 2.757,19.775 2.757,23.427 4.853,25.524 U4.24
GPIO5: R37.1 U4.34 | length 8
  Top Layer w0.152: U4.34 9.16,25.003 10.668,23.495 10.668,22.86 10.922,22.606 13.951,22.606 R37.1
GPIO12: U4.18
GPIO13: U4.20
GPIO14: U4.17
GPIO15: TP2.1 U4.21 | length 10.4
  Top Layer w0.152: v1(0.762,20.955) 0.381,21.336 0.381,25.781 1.346,26.746 3.167,26.746 4.43,28.01 U4.21
GPIO16: U4.25
GPIO17: U4.27
GPIO18: U4.35 | length 2
  Top Layer w0.152: U4.35 9.56,25.562 10.485,24.638 v1(10.668,24.638)
GPIO19: U4.38 | length 1.5
  Top Layer w0.152: U4.38 11.271,27.21 v1(11.938,26.543)
GPIO21: U4.42
GPIO22: U4.39 | length 1.4
  Top Layer w0.152: U4.39 11.633,27.61 v1(11.938,27.305)
GPIO23: U4.36 | length 1.5
  Top Layer w0.152: U4.36 9.96,25.981 10.541,25.4 v1(11.049,25.4)
GPIO25: U4.14
GPIO26: U4.15
GPIO27: U4.16
GPIO32: 
GPIO33: 
GPIO34: 
GPIO35: 
GPIO36: 
GPIO37: 
GPIO38: 
GPIO39: 
NetA1_1: A1.1 pad.1@12.509,37.148 | length 1.7
  Top Layer w0.305: 12.7,37.338 13.208,37.846 A1.1
NetC12_2: C12.2 L2.2 U4.2 | length 2.4
  Top Layer w0.152: U4.2 9.56,34.071 L2.2 ; 9.56,34.579 9.652,34.671
NetJP1_1: 
NetJP1_3: 
NetJP1_5: 
NetJP1_7: 
NetJP1_9: 
NetJP1_11: 
NetJP1_13: 
NetJP1_15: 
NetLED1_2: LED.2 R37.2
NetR2_1: C35_1_1.1 C36_1_1.1 | length 1.1
  Bottom Layer w0.254: C35_1_1.1 C36_1_1.1
NetR8_1: R8.1 U4.41 | length 6.8
  Top Layer w0.152: U4.41 12.23,28.41 12.954,27.686 12.954,25.908 14.478,24.384 R8.1
NetR14_2: 
NetR15_1: C33_1_1.1 C34_1_1.1 | length 1.1
  Bottom Layer w0.254: C34_1_1.1 C33_1_1.1
NetR18_1: C33_2.2 C34_2.2 | length 1.1
  Bottom Layer w0.305: C34_2.2 C33_2.2
NetR20_1: C35_2.2 C36_2.2 | length 1.1
  Bottom Layer w0.305: C35_2.2@16.071,10.033 C36_2.2@16.071,11.176
NetR27_1: C33.2 C34.2 | length 1.1
  Top Layer w0.254: C34.2@2.344,13.335 C34.2 C33.2@2.344,14.478
NetR29_1: C35.2 C36.2 | length 1.1
  Top Layer w0.254: C35.2 C36.2
NetR35_1: C33_1.1 C34_1.1 | length 1.1
  Top Layer w0.254: C34_1.1 C33_1.1
NetR42_1: C35_1.1 C36_1.1 | length 1.1
  Top Layer w0.254: C35_1.1 C36_1.1
SCK/CLK: U3.6 U4.31 | length 6.8
  Top Layer w0.152: U4.31 7.976,26.087 7.976,23.901 8.509,23.368 v1(8.509,22.098)
  Bottom Layer w0.305: v1(5.969,21.971) 8.382,21.971 v1(8.509,22.098)
SCS/CMD: U3.1 U4.30 | length 11
  Top Layer w0.152: U4.30 7.56,23.428 7.765,23.223 7.765,19.703 7.747,19.685
  Top Layer w0.305: 7.747,19.685 8.001,19.431 U3.1
SDI/SD1: U3.5 U4.33 | length 7.5
  Top Layer w0.152: U4.33 8.76,24.514 v1(10.033,23.241)
  Bottom Layer w0.305: v1(5.969,23.241) v1(10.033,23.241)
SDO/SD0: U3.2 U4.32 | length 8.4
  Top Layer w0.152: U4.32 8.36,24.152 9.398,23.114 9.398,20.828
  Top Layer w0.305: 9.398,20.828 9.525,20.701 U3.2
SHD/SD2: U3.7 U4.28 | length 7
  Top Layer w0.152: 6.604,20.701 6.698,20.795 6.698,22.834 6.76,22.896 U4.28
  Top Layer w0.305: U3.7 6.604,20.701
SWP/SD3: U3.3 U4.29 | length 8
  Top Layer w0.152: U4.29 7.137,26.079 7.137,22.708 v1(7.232,22.613)
  Bottom Layer w0.305: v1(7.232,22.613) 7.326,22.708 9.042,22.708 9.779,21.971 v1(11.303,21.971)
U0RXD: JP2.2 U4.40 | length 10.2
  Top Layer w0.152: U4.40 12.122,28.01 12.573,27.559 12.573,25.751 14.418,23.905 15.291,23.905 16.129,23.067 v1(16.129,21.463)
U0TXD: JP2.1 R8.2 | length 0.8
  Top Layer w0.152: R8.2 v1(16.129,24.384) v1@15.886,24.384
VBIAS: R12.2 U1.3 U1.5 U1.10 U1.12 U2.3 U2.5 U2.10 U2.12 | length 26.1
  Top Layer w0.254: U1.5 6.189,11.43 7.366,11.43 7.493,11.557 v1@7.493,12.192 ; U1.3 7.268,12.798 7.493,12.573 v1@7.493,12.192 ; v1(8.509,8.255) 8.509,9.585 8.103,9.992 8.103,11.582 v1@7.493,12.192 ; U1.10 10.854,11.498 10.414,11.938 10.414,12.446 10.795,12.827 11.884,12.827 U1.12
  Bottom Layer w0.254: U2.3 7.014,11.586 v1(7.62,12.192) 7.62,12.446 7.18,12.886 U2.5 ; R12.2 8.509,6.8 v1(8.509,8.255) 8.509,8.888 9.423,9.803 9.423,11.286 v1(10.407,12.269) ; U2.12 10.766,11.586 10.407,11.945 v1(10.407,12.269) ; U2.10 11.024,12.886 v1(10.407,12.269)
VDD_SDIO: C17.2 U3.8 U4.26 | length 9.5
  Top Layer w0.152: U3.8 4.064,19.431 3.669,19.826 3.669,23.466 4.079,23.876 5.334,23.876 5.911,24.453 C17.2 5.96,24.814 U4.26
VREF2V5: C9.2 R12.1 U5.2 | length 4.8
  Bottom Layer w0.305: U5.2 6.986,5.461 7.805,5.461 ; R12.1 7.855,5.511 7.805,5.461 ; C9.2 8.509,5.461 7.805,5.461
XTAL_N: C25.1 U4.44 X1.3 | length 8.5
  Top Layer w0.152: U4.44 12.107,29.61 cw(c12.107,29.144) 12.573,29.144 12.573,28.882 ccw(c13.007,28.882) 13.007,28.448 14.715,28.448 cw(c14.715,27.348) X1.3 ccw(c15.815,27.096) 15.563,27.096 C25.1
XTAL_P: C24.1 U4.45 X1.1 | length 5.9
  Top Layer w0.152: U4.45 13.612,30.01 cw(c13.612,29.507) X1.1 ccw(c14.115,29.802) 14.409,29.802 C24.1
pads on no net: Designator1.1 Designator2.1 JP1.0

## Polygon pours and split planes (outlines as drawn)
GND on Signal Layer 1 "Bottom Layer-GND" (solid, pour order 2): 0,37.973 0.127,37.846 17.399,37.846 17.399,0.635 0.127,0.635 0.127,37.719 0,37.846
GND on Signal Layer 2 "Bottom Layer-GND" (solid, pour order 4): 0.254,37.719 17.145,37.719 17.145,0.889 0.254,0.889

## Keep-outs
Keep-Out Layer:
  lines w0.254: 1.016,44.831 ccw(c1.016,43.815) 0,43.815 0,39.116 7.747,39.116 7.747,38.227 0,38.227 0,21.463 0,7.366 0,0.635 2.286,0.635 ; 1.143,44.831 16.383,44.831 cw(c16.383,43.815) 17.399,43.815 17.399,39.116 ; 2.286,0 2.286,0.635 ; 17.272,39.116 16.383,39.116 16.383,38.227 17.399,38.227 17.399,7.62 ; 17.399,7.874 17.399,0.635 15.24,0.635 15.24,-0.381 17.399,-0.381 17.399,-2.667 cw(c16.383,-2.667) 16.383,-3.683 1.016,-3.683 cw(c1.016,-2.667) 0,-2.667 0,-0.381 2.286,-0.381 2.286,0.635

## Other copper
Top Layer:
  region net GND: 1.016,30.226 1.016,27.305 2.54,27.305 2.54,28.067 3.175,28.702 3.175,30.226
  region net A1-2: 9.144,37.719 9.144,35.941 10.033,35.941 10.033,37.719
  region net NetC12_2: 9.144,35.56 9.144,33.782 10.16,33.782 10.16,35.56
  region net NetLED1_2: 15.113,23.368 15.113,22.225 14.478,21.59 14.478,20.574 15.24,20.574 15.494,20.828 15.494,23.368
  region net GND: 2.667,36.449 2.667,35.687 8.382,35.687 8.382,36.449
  region net +3.3: 8.382,36.703 8.382,37.592 2.54,37.592 2.413,37.465 2.413,36.703 2.667,36.703

## Silkscreen, mask and mechanical layers (free items; w line width, h text height)
Top Overlay:
  lines w0.254: 14.478,35.295 14.478,34.71 14.563,34.71 ; 14.478,36.157 14.478,36.742 14.563,36.742 ; 16.425,34.71 16.51,34.71 16.51,36.742 16.425,36.742
  text "BOOT" at 2.159,19.304 h0.76 r90
  text "C" at 4.191,14.859 h1.02
  text "B" at 12.827,14.859 h1.02
  text "A" at 12.954,8.255 h1.02
  text "D" at 4.064,8.128 h1.02
Bottom Overlay:
  text "RST" at 1.905,36.957 h0.76 r90
  text "8ch tactile-senser-detector" at 10.287,36.83 h1.27 r90
  text "TBSI-SSR" at 5.969,32.258 h2.03 r90
  text "TX0" at 13.589,24.384 h1.02
  text "RX0" at 13.589,21.59 h1.02
  text "3V3" at 13.589,19.05 h1.02
  text "GND" at 13.589,16.51 h1.02
  text "G" at 5.08,15.367 h1.02
  text "F" at 11.049,15.24 h1.02
  text "E" at 13.462,8.382 h1.02
  text "H" at 5.08,8.255 h1.02
  text "3V3-MCU" at 16.256,6.731 h0.76
  text "3V3-IV" at 16.256,3.81 h0.76
  text "GND" at 16.256,1.27 h0.76
  text "H" at 5.461,0.889 h0.76
  text "G" at 6.35,0.889 h0.76
  text "F" at 7.239,0.889 h0.76
  text "E" at 8.128,0.889 h0.76
  text "D" at 10.033,0.889 h0.76
  text "C" at 10.922,0.889 h0.76
  text "B" at 11.811,0.889 h0.76
  text "A" at 12.7,0.889 h0.76

## Dimensions
0,39.116 to 17.399,39.116 on Top Overlay
17.399,38.227 to 17.399,0.635 on Top Overlay
16.383,-3.683 to 17.399,38.227 on Top Overlay